# Altium PCB Simple_Foc_Core.pcbdoc
Units mil, origin at the board's own origin, x right, y up, seen from the top; angles counter-clockwise.
Board outline 2955 x 2795 mil, 2 copper layers (Top Layer, Bottom Layer); 21 components, 60 nets, 187 pads, 97 vias.
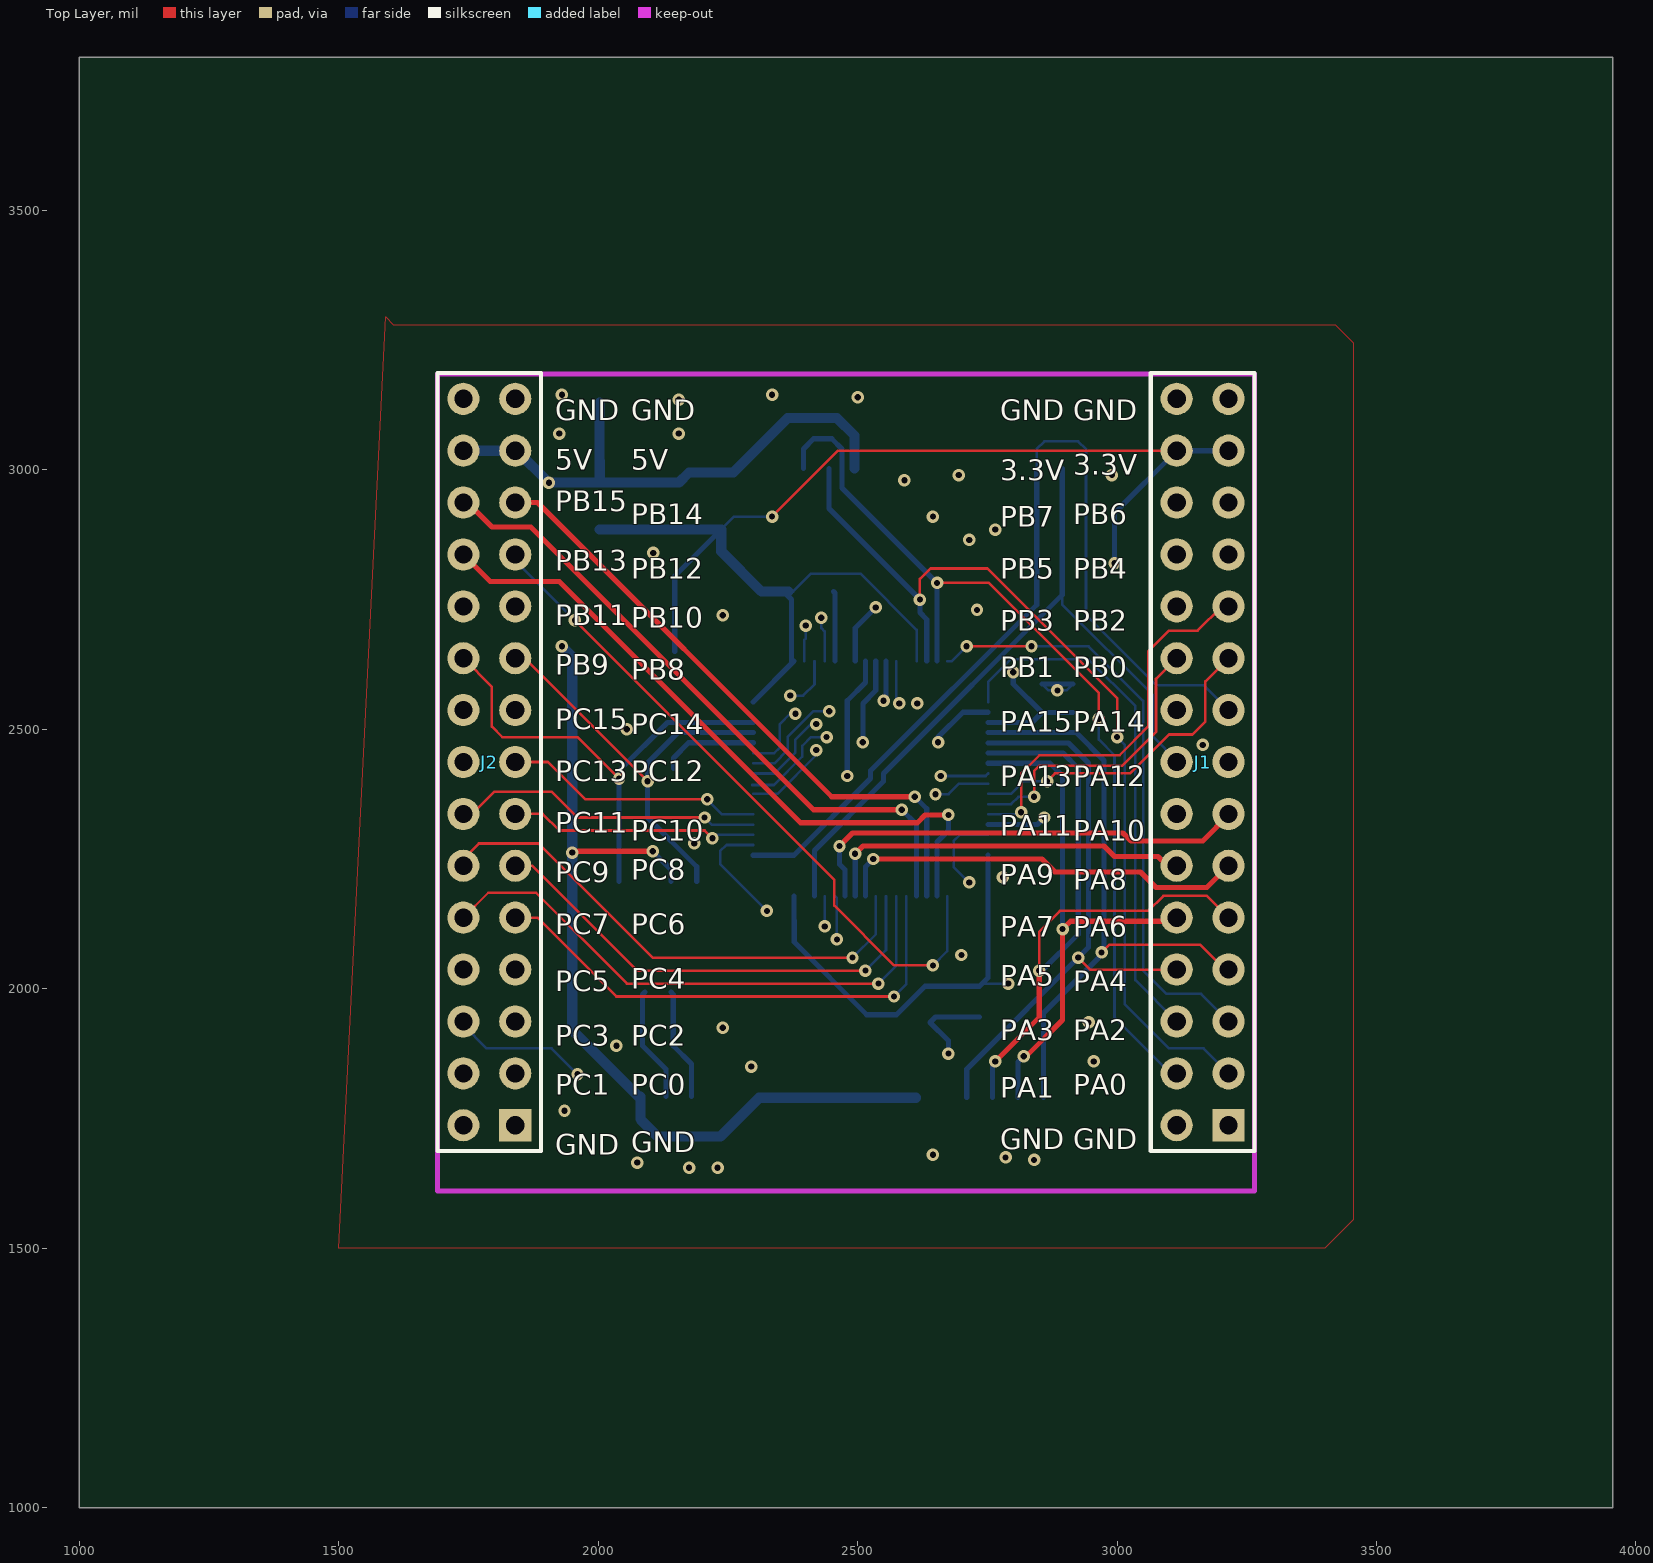
[diagram p0: Top Layer view]
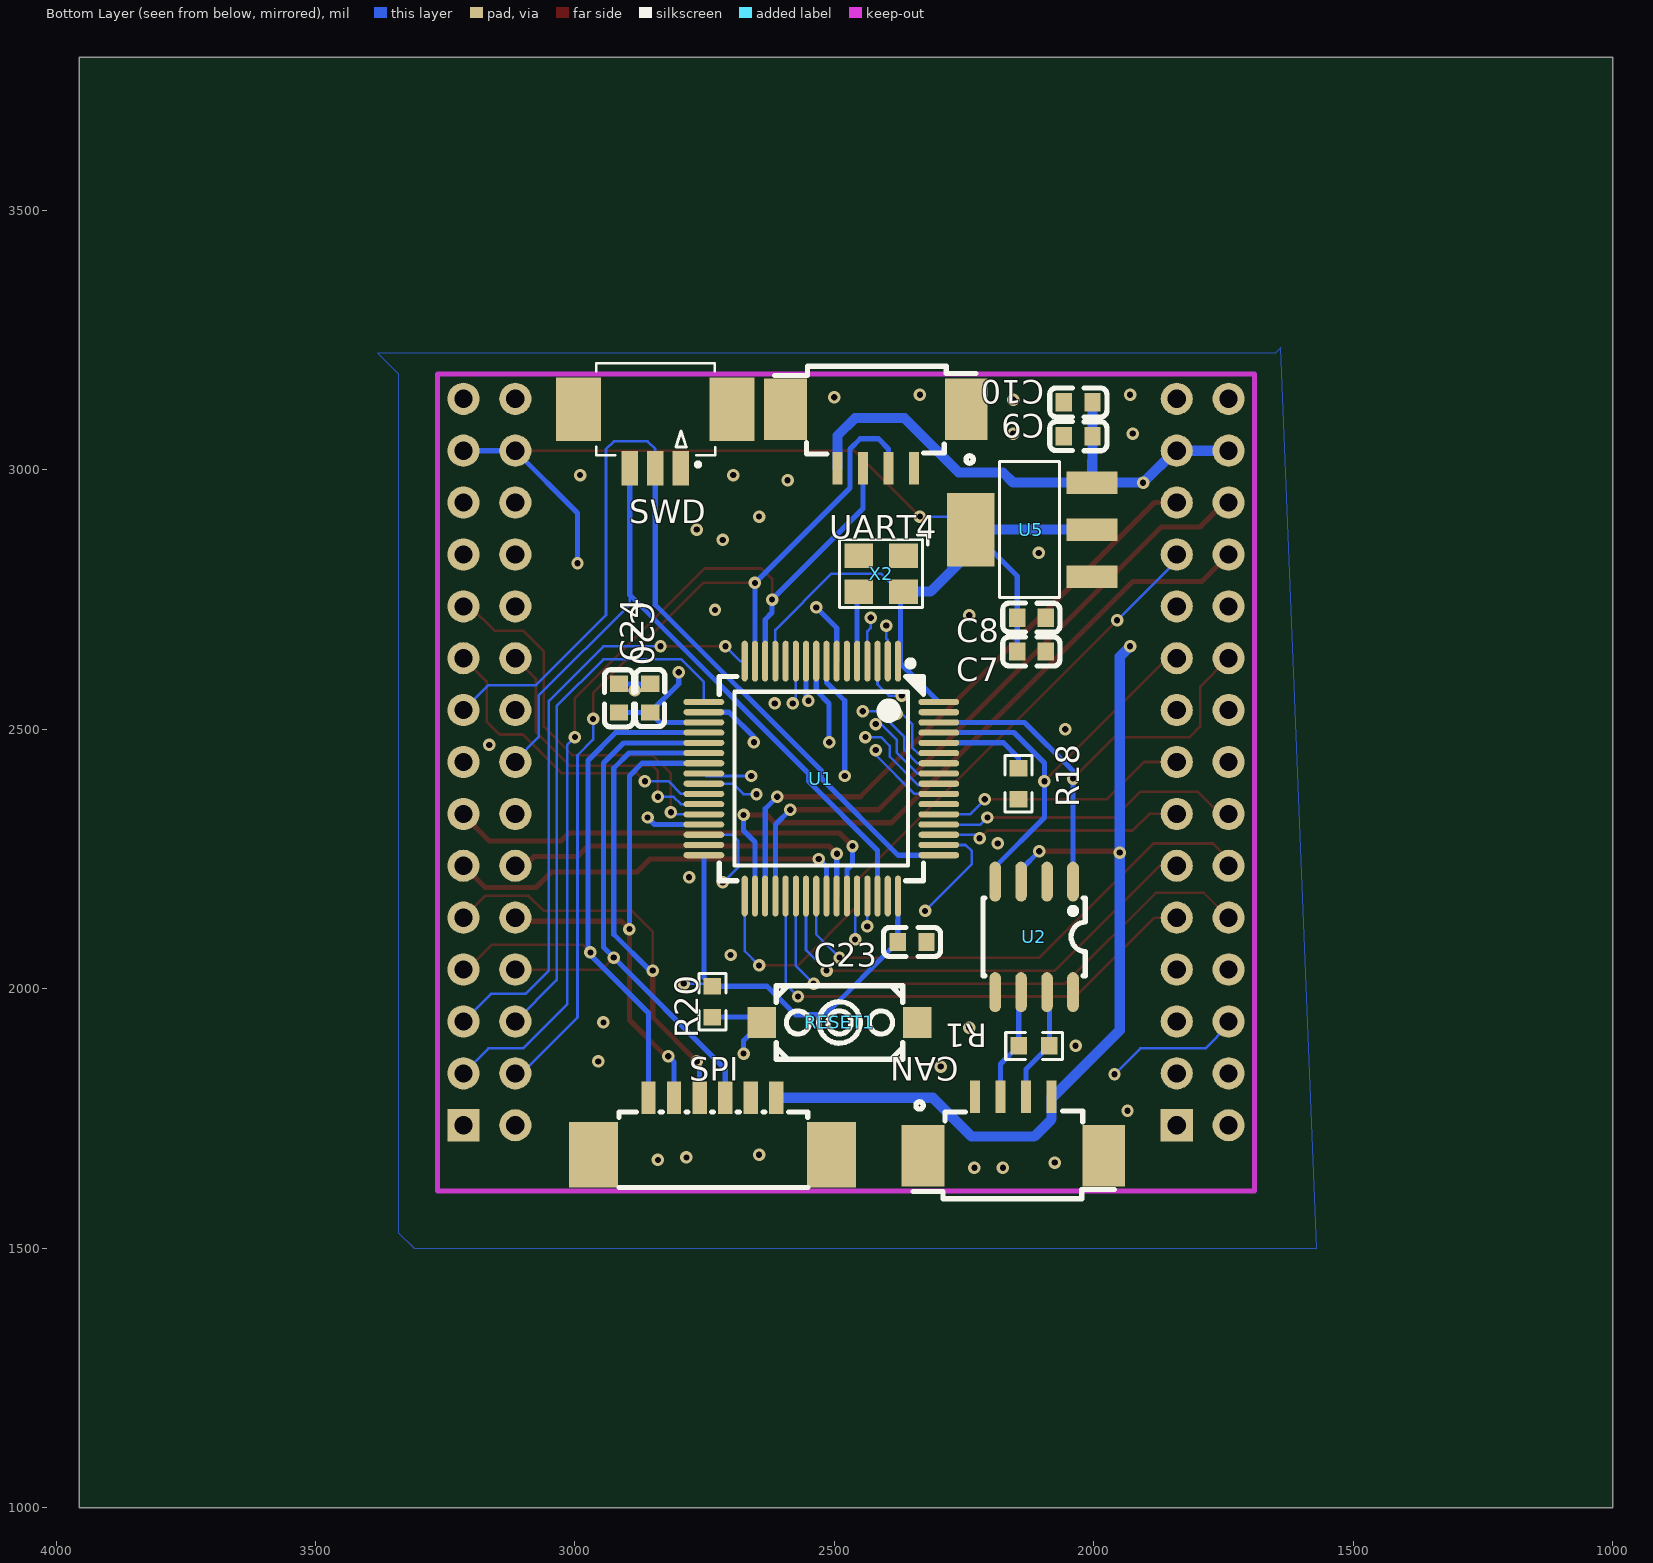
[diagram p1: Bottom Layer view, seen from below]

## Layer stack, top to bottom
Top Layer: signal copper (thickness not stored)
Dielectric: dielectric 12.6, FR-4, Dk 4.8
Bottom Layer: signal copper (thickness not stored)

## Board outline
3955,1000 1000,1000 1000,3795 3955,3795

## Components (designator, comment, footprint, x,y, rotation, side; value= is the part's Value field where it differs from the comment)
C7 "22u" C0603 2120,2650 r0 bottom
C8 "0.1u" C0603 2120,2715 r0 bottom
C9 "22u" C0603 2030,3065 r180 bottom
C10 "0.1u" C0603 2030,3130 r180 bottom
C20 "10uF" C0603 2855,2560 r90 bottom
C23 "0.1uF" C0603 2350,2090 r0 bottom
C24 "10nF" C0603 2915,2560 r270 bottom
CAN "1.25-4P WT" CONN-SMD_1.25-4PWT 2155,1735 r180 bottom
J1 "HDR-M-2.54_2x15" HDR-M-2.54_2X15 3164.8,2436.97 r90 top
J2 "HDR-M-2.54_2x15" HDR-M-2.54_2X15 1790,2436.97 r90 top
R1 "120R" R0603 2115,1890 r180 bottom
R18 "1k" R0603 2145,2395 r270 bottom
R20 "1k" R0603 2735,1975 r270 bottom
RESET1 "K2-3.6×6.1_SMD" KEY-SMD_2P-L6.2-W3.6-LS8.0 2490,1935 r0 bottom
SPI "1.25T-6P-WT" CONN-SMD_6P-P1.25_1.25T-6P-WT 2735,1735 r0 bottom
SWD "1.25T-3PWT" CONN-SMD_3P-P1.25_1.25T-3PWT 2845,3060 r0 bottom
U1 "STM32F405RGT6" LQFP-64_L10.0-W10.0-P0.50-LS12.0-BL 2525,2405 r180 bottom
U2 "TJA1050T/CM,118" SOIC-8_L5.0-W4.0-P1.27-LS6.0-BL 2115,2100 r180 bottom
U5 "AMS1117-3.3" SOT-223-3_L6.5-W3.4-P2.30-LS7.0-BR 2120,2885 r0 bottom
UART4 "1.25-4P WT" CONN-SMD_1.25-4PWT 2420,3060 r0 bottom
X2 "8MHz" OSC-SMD_4P-L3.2-W2.5-BL 2410,2800 r180 bottom

## Footprints (in the part's own frame and the unit in brackets; to place one, negate y for a bottom-side part, rotate by r counter-clockwise, add the part's x,y. Pads: shape width x height; smd on the part's side, far side on the other; paste and mask are expansions set on the pad)
C0603 [mm]
  rect 0.8x0.9 smd: 1(0.7,0) 2(-0.7,0)
  silkscreen extent -1.39,-0.72 1.41,0.71
CONN-SMD_1.25-4PWT [mm]
  rect 0.5x1.6 smd: 1(-1.875,1.45) 2(-0.625,1.45) 3(0.625,1.45) 4(1.875,1.45)
  rect 2.1x3 smd: 5(-4.425,-1.45) 6(4.425,-1.45)
  silkscreen extent -4.9,-3.55 4.95,1.2
CONN-SMD_3P-P1.25_1.25T-3PWT [mm]
  rect 0.8x1.7 smd: 1(-1.25,1.45) 2(0,1.45) 3(1.25,1.45)
  rect 2.2x3.1 smd: 4(3.75,-1.45) 5(-3.75,-1.45)
  silkscreen extent -2.94,-3.7 2.9,1.36
CONN-SMD_6P-P1.25_1.25T-6P-WT [mm]
  rect 0.7x1.6 smd: 1(-3.125,-1.398) 2(-1.875,-1.398) 3(-0.625,-1.399) 4(0.625,-1.401) 5(1.875,-1.401) 6(3.125,-1.402)
  rect 2.4x3.2 smd: 7(5.825,1.402) 8(-5.825,1.401)
  silkscreen extent -4.67,-0.7 4.58,3
HDR-M-2.54_2X15 [mil]
  rect 62x62 hole 35: 1(-700,-50)
  round 62 hole 35: 2(-700,50) 3(-600,-50) 4(-600,50) 5(-500,-50) 6(-500,50) 7(-400,-50) 8(-400,50) 9(-300,-50) 10(-300,50) 11(-200,-50) 12(-200,50) 13(-100,-50) 14(-100,50) 15(0,-50) 16(0,50) 17(100,-50) 18(100,50) 19(200,-50) 20(200,50) 21(300,-50) 22(300,50) 23(400,-50) 24(400,50) 25(500,-50) 26(500,50) 27(600,-50) 28(600,50) 29(700,-50) 30(700,50)
  silkscreen extent -750,-100 750,100
KEY-SMD_2P-L6.2-W3.6-LS8.0 [mm]
  rect 1.4x1.5 smd: 1(3.8,0) 2(-3.8,0)
  silkscreen extent -3.1,-1.8 3.1,1.8
LQFP-64_L10.0-W10.0-P0.50-LS12.0-BL [mm]
  oval 0.3x2 smd: 1(3.75,5.75) 2(3.25,5.75) 3(2.75,5.75) 4(2.25,5.75) 5(1.75,5.75) 6(1.25,5.75) 7(0.75,5.75) 8(0.25,5.75) 9(-0.25,5.75) 10(-0.75,5.75) 11(-1.25,5.75) 12(-1.75,5.75) 13(-2.25,5.75) 14(-2.75,5.75) 15(-3.25,5.75) 16(-3.75,5.75) 33(-3.75,-5.75) 34(-3.25,-5.75) 35(-2.75,-5.75) 36(-2.25,-5.75) 37(-1.75,-5.75) 38(-1.25,-5.75) 39(-0.75,-5.75) 40(-0.25,-5.75) 41(0.25,-5.75) 42(0.75,-5.75) 43(1.25,-5.75) 44(1.75,-5.75) 45(2.25,-5.75) 46(2.75,-5.75) 47(3.25,-5.75) 48(3.75,-5.75)
  oval 2x0.3 smd: 17(-5.75,3.75) 18(-5.75,3.25) 19(-5.75,2.75) 20(-5.75,2.25) 21(-5.75,1.75) 22(-5.75,1.25) 23(-5.75,0.75) 24(-5.75,0.25) 25(-5.75,-0.25) 26(-5.75,-0.75) 27(-5.75,-1.25) 28(-5.75,-1.75) 29(-5.75,-2.25) 30(-5.75,-2.75) 31(-5.75,-3.25) 32(-5.75,-3.75) 49(5.75,-3.75) 50(5.75,-3.25) 51(5.75,-2.75) 52(5.75,-2.25) 53(5.75,-1.75) 54(5.75,-1.25) 55(5.75,-0.75) 56(5.75,-0.25) 57(5.75,0.25) 58(5.75,0.75) 59(5.75,1.25) 60(5.75,1.75) 61(5.75,2.25) 62(5.75,2.75) 63(5.75,3.25) 64(5.75,3.75)
  silkscreen extent -5,-5 5,5.79
OSC-SMD_4P-L3.2-W2.5-BL [mm]
  rect 1.4x1.2 smd: 1(1.1,0.875) 2(-1.1,0.875) 3(-1.1,-0.875) 4(1.1,-0.875)
  silkscreen extent -2.03,-1.65 2.29,1.9
R0603 [mil]
  rect 31.75x34.02 smd: 1(29.66,0) 2(-29.66,0)
  silkscreen extent -55,-26 55,26
SOIC-8_L5.0-W4.0-P1.27-LS6.0-BL [mil]
  oval 22.38x76.78 smd: 1(75,106.5) 2(25,106.5) 3(-25,106.5) 4(-75,106.5) 5(-75,-106.5) 6(-25,-106.5) 7(25,-106.5) 8(75,-106.5)
  silkscreen extent -98,-75 98,75
SOT-223-3_L6.5-W3.4-P2.30-LS7.0-BR [mm]
  rect 2.5x1.1 smd: 1(-2.97,2.3) 2(-2.97,0) 3(-2.97,-2.3)
  rect 2.34x3.6 smd: 4(2.97,0)
  silkscreen extent -1.37,-3.33 1.57,3.33

## Via types
v1: diameter 24, hole 12, Top Layer to Bottom Layer, tented both sides, 97 vias

## Nets (pads, with @x,y where several pads share a name; then routed paths per layer and width w, separated by ;. In a path a pad name is that pad's centre, name@x,y a point inside that pad or via, vN(x,y) a via of type N, cw(c..) or ccw(c..) an arc to the next point about the centre after c; other vN are vias at no path point)
+3.3V: C7.1 C8.1 C20.2 C23.1 C24.1 J1.27 J1.28 R20.2 U1.1 U1.13 U1.19 U1.32 U1.48 U1.64 U5.2 U5.4 X2.4 | length 5406.1
  Top Layer w5: v1(2335,2910) 2461.97,3036.97 J1.28
  Mid-Layer 1 w5: v1(2995,2820) 3030,2785 3160,2785 3165,2780 v1(3165,2470)
  Mid-Layer 1 w10: v1(2800,2610) 2820,2630 2855,2630 2965,2740 2965,2790 v1(2995,2820)
  Mid-Layer 2 w5: v1(2790,2010) 2815,1985 3130,1985 3165,2020 v1(3165,2470)
  Bottom Layer w5: U5.4 2261.93,2910 v1(2335,2910) ; X2.4@2366.69,2765.55 2375.55,2765.55 2410,2800 2505,2800 2613.6,2691.4 U1.13 ; R20.2 2740.34,2010 v1(2790,2010)
  Bottom Layer w10: C7.1 C8.1 2147.56,2795.63 U5.4 ; U1.64 U1.1 ; X2.4@2361.69,2760.55 2372.36,2749.88 U1.1@2372.36,2626.37 ; U1.48 C23.1 2517.6,1950 2575,1950 2629.7,2004.7 R20.2 ; R20.2 2751.37,2021.03 U1.32 ; U1.19 2835.83,2513.27 C20.2 ; v1(2800,2610) 2800,2587.44 C20.2 ; C24.1 C20.2 ; v1(2995,2820) 2995,2917.17 J1.28 J1.27
  Bottom Layer w19.68: U5.2 U5.4 2236.93,2843.07 2314.45,2765.55 X2.4@2366.69,2765.55
+5V: C9.1 C10.1 CAN.4 J2.27 J2.28 SPI.1 U2.3 U5.3 UART4.4 | length 3169
  Top Layer w10: v1(1950,2262.5) 1952.5,2265 v1(2105,2265)
  Mid-Layer 2 w19.68: v1(1905,2975) 1905,2685 v1(1930,2660)
  Bottom Layer w10: v1(2105,2265) 2140,2230 U2.3
  Bottom Layer w19.68: J2.28 J2.27 1843.03,3036.97 v1(1905,2975) 1905.55,2975.55 U5.3@2003.07,2975.55 ; v1(1930,2660) 1950,2640 v1(1950,2262.5) 1950,1920 2000,1870 2077.92,1792.08 CAN.4 2081.2,1748.8 2115,1715 2235,1715 2310,1790 SPI.1 ; C9.1 2003.1,2975.5 2155.5,2975.5 2175,2995 2260,2995 2365,3100 2460,3100 2493.8,3066.2 UART4.4 ; C9.1 C10.1
CAN1_RX: J2.19 U1.61 U2.4 | length 848.9
  Top Layer w5: J2.19 1858.03,2636.97 v1(2095,2400)
  Bottom Layer w10: U2.4 2190,2235 2095,2330 2095,2435 2153.6,2493.6 U1.61
CAN1_TX: J2.20 U1.62 U2.1 | length 951.9
  Top Layer w5: J2.20 1795,2581.97 1795,2525 1795,2505 1815,2485 1960,2485 v1(2040,2405)
  Bottom Layer w10: U2.1 2040,2420 2133.3,2513.3 U1.62
CAN_H: CAN.3 R1.1 U2.7 | length 222
  Bottom Layer w10: U2.7 2085.34,1988.84 R1.1 2130.4,1844.94 CAN.3
CAN_L: CAN.2 R1.2 U2.6 | length 217.8
  Bottom Layer w10: U2.6 2144.66,1988.84 R1.2 2179.61,1855.05 CAN.2
GND: C7.2 C8.2 C9.2 C10.2 C20.1 C23.2 C24.2 CAN.1 J1.1 J1.2 J1.29 J1.30 J2.1 J2.2 J2.29 J2.30 R18.1 RESET1.2 SPI.2 SWD.1 U1.12 U1.18 U1.63 U2.2 U2.8 U5.1 UART4.1 X2.2 | length 256.6
  Bottom Layer w5: C20.1 2867.56,2575 v1(2885,2575) 2902.44,2575 C24.2
  Bottom Layer w10: v1(2655,2475) 2655,2485 2702.95,2532.95 U1.18 ; C20.1 C24.2
  other v1: 2175,1655 2230,1655 2075,1665 2840,1670 2785,1675 2645,1680 1935,1765 2295,1850 2955,1860 2035,1890 2240,1925 2945,1935 2700,2065 2185,2280 2055,2500 2615,2550 2240,2720 2730,2730 2715,2865 2765,2885 2645,2910 2590,2980 2695,2990 2990,2990 1925,3070 2155,3070 2155,3135 2500,3140 1930,3145 2335,3145
IIC1_SCL: J1.25 U1.58 | length 1178
  Mid-Layer 2 w5: v1(2445,2535) 2454.46,2535 2464.46,2525 ; 2465,2525 2775.72,2525 ; 2775,2525 3060,2810 3060,2845 3100,2885 3180,2885 3214.8,2919.8 J1.25
  Bottom Layer w5: U1.58 2339.5,2434.5 2365,2460 2365,2485 2415,2535 v1(2445,2535)
IIC1_SDA: J1.26 U1.59 | length 1070.2
  Mid-Layer 2 w5: v1(2380,2530) 2410,2560 2515,2560 2535,2580 2805,2580 3040,2815 3040,2862.17 J1.26
  Bottom Layer w5: U1.59 2339.2,2454.2 2350,2465 2350,2510 2370,2530 v1(2380,2530)
INC_A: J2.9 U1.37 | length 996.5
  Top Layer w5: J2.9 1883,2137 2035,1985 v1(2570,1985)
  Bottom Layer w5: v1(2570,1985) 2593.9,2008.9 U1.37
INC_B: J2.10 U1.38 | length 1075.2
  Top Layer w5: J2.10 1788.03,2185 1880,2185 2055,2010 v1(2540,2010)
  Bottom Layer w5: v1(2540,2010) 2574.21,2044.21 U1.38
INC_Z: J2.11 U1.39 | length 918.7
  Top Layer w5: J2.11 1873.03,2236.97 2075,2035 v1(2515,2035)
  Bottom Layer w5: v1(2515,2035) 2554.53,2074.53 U1.39
IU: J2.3 U1.8 | length 1113.3
  Mid-Layer 1 w10: J2.3 1907,1837 v1(2480,2410)
  Bottom Layer w10: v1(2480,2410) 2480,2555 2515.16,2590.16 U1.8
IV: J2.4 U1.9 | length 1200.9
  Mid-Layer 1 w10: J2.4 1757,1837 1810,1890 1920,1890 2505,2475 v1(2510,2475)
  Bottom Layer w10: v1(2510,2475) 2510,2550 2534.84,2574.84 U1.9
IW: J2.5 U1.10 | length 1044.2
  Mid-Layer 1 w10: J2.5 1931.97,1936.97 v1(2550,2555)
  Bottom Layer w10: v1(2550,2555) 2554.53,2559.53 U1.10
PA2: J1.5 U1.16 | length 1158.1
  Top Layer w5: v1(2710,2660) v1(2835,2660)
  Bottom Layer w5: U1.16 2681.37,2631.37 v1(2710,2660) ; v1(2835,2660) 2945,2660 3050,2555 3050,2035 3095,1990 3161.8,1990 J1.5
PA3: J1.6 U1.17 | length 1018.8
  Bottom Layer w5: U1.17 2751.4,2591.4 2795,2635 2945,2635 3035,2545 3035,2016.8 J1.6
PA11: J1.14 U1.44 | length 840.3
  Mid-Layer 1 w5: v1(2460,2095) 2790,2095 3032,2337 J1.14
  Bottom Layer w5: U1.44 2460,2174.73 v1(2460,2095)
PA12: J1.15 U1.45 | length 968.3
  Mid-Layer 1 w5: v1(2436.42,2120) 2785,2120 3055,2390 3167.8,2390 J1.15
  Bottom Layer w5: v1(2436.42,2120) U1.45
PA15: J1.18 U1.50 | length 1189.9
  Mid-Layer 1 w5: v1(2325,2150) 2760,2150 3114.8,2504.8 J1.18
  Bottom Layer w5: U1.50@2298.6,2277.1 2247.1,2277.1 2235,2265 2235,2240 v1(2325,2150)
PB0: J1.19 U1.26 | length 616.9
  Top Layer w5: v1(2865,2400) 2880,2415 3025,2415 3100,2490 3145,2490 3170,2515 3170,2592.2 J1.19
  Bottom Layer w5: U1.26 2795.5,2375.5 2820,2400 v1(2865,2400)
PB1: J1.20 U1.27 | length 569
  Top Layer w5: v1(2840,2370) 2840,2390 2840,2420 2850,2430 3010,2430 3075,2495 3075,2597.17 J1.20
  Bottom Layer w5: U1.27 2795.79,2355.79 2810,2370 v1(2840,2370)
PB2: J1.21 U1.28 | length 758.4
  Top Layer w5: v1(2815,2340) 2815,2415 2850,2450 3005,2450 3060,2505 3060,2650 3100,2690 3155,2690 3202,2737 J1.21
  Bottom Layer w5: U1.28 2811.1,2336.1 v1(2815,2340)
PB3: J1.22 U1.55 | length 1062.4
  Mid-Layer 2 w5: v1(2420,2460) 2445,2435 2915,2435 3062.8,2582.8 3062.8,2685 J1.22
  Bottom Layer w5: U1.55 2345.5,2375.5 2420,2450 v1(2420,2460) v1@2410,2460
PB4: J1.23 U1.56 | length 1216.5
  Mid-Layer 2 w5: v1(2440,2485) 2445,2485 2480,2450 2840,2450 2980,2590 3020,2590 3020,2715 3090,2785 3162.8,2785 J1.23
  Bottom Layer w5: U1.56@2296.81,2392.58 2338.35,2392.58 2393.19,2447.42 2393.19,2468.19 2410,2485 v1(2440,2485)
PB5: J1.24 U1.57 | length 1012.5
  Mid-Layer 2 w5: v1(2420,2510) 2760,2510 2770,2500 3112,2837 J1.24
  Bottom Layer w5: U1.57 2339.84,2414.84 2380,2455 2380,2480 2410,2510 v1(2420,2510)
PB10: J2.21 U1.29 | length 1487.5
  Mid-Layer 1 w5: J2.21 1943,2840 v1(2106.18,2840) 2470,2840 2895,2415 2895,2365 v1(2860,2330)
  Bottom Layer w10: U1.29 2846.42,2316.42 v1(2860,2330)
PB11: J2.22 U1.30 | length 1631.7
  Mid-Layer 1 w5: J2.22 1748,2737 1795,2690 1870,2690 1980,2800 2430,2800 2715,2515 v1(2715,2205)
  Bottom Layer w5: v1(2715,2205) 2685,2235 2685,2255 2685,2285 2696.73,2296.73 2700,2296.73 U1.30
PB12: J2.23 U1.33 | length 1314.4
  Top Layer w5: v1(1955,2710) 2455,2210 2455,2160 2570,2045 v1(2645,2045)
  Bottom Layer w5: J2.23 1840,2825 v1(1955,2710) ; v1(2645,2045) 2672.64,2072.64 U1.33
PC3: J2.6 U1.11 | length 1333.6
  Mid-Layer 1 w5: v1(1960,1835) 1990,1865 1990,1890 2475,2375 2495,2375 2580,2460 v1(2580,2550)
  Bottom Layer w5: J2.6 1740,1930 1785,1885 1910,1885 v1(1960,1835) ; U1.11 2574.21,2555.79 v1(2580,2550)
PC4: J2.7 U1.24 | length 1067.9
  Mid-Layer 2 w5: J2.7 1916.97,2036.97 1980,2100 2210,2100 2520,2410 v1(2660,2410)
  Bottom Layer w5: v1(2660,2410) 2746.53,2410 U1.24
PC5: J2.8 U1.25 | length 1219.4
  Mid-Layer 2 w5: J2.8 1791.97,1985 1910,1985 2000,2075 2215,2075 2535,2395 2630,2395 v1(2650,2375)
  Bottom Layer w5: v1(2650,2375) 2675,2375 2695.16,2395.16 U1.25
PC9: J2.12 U1.40 | length 1003.8
  Top Layer w5: J2.12 1740,2250 1770,2280 1885,2280 2105,2060 v1(2490,2060)
  Bottom Layer w5: v1(2490,2060) 2534.84,2104.84 U1.40
PC10: J2.13 U1.51 | length 480.9
  Top Layer w5: J2.13 1893,2337 1925,2305 2205,2305 v1(2220,2290)
  Bottom Layer w5: v1(2220,2290) 2226.73,2296.73 U1.51
PC11: J2.14 U1.52 | length 602.8
  Top Layer w5: J2.14 1756.97,2336.97 1800,2380 1910,2380 1960,2330 v1(2205,2330)
  Bottom Layer w5: v1(2205,2330) 2218.58,2316.42 U1.52
PC12: J2.15 U1.53 | length 500.4
  Top Layer w5: J2.15 1903.03,2436.97 1975,2365 v1(2210,2365)
  Bottom Layer w5: v1(2210,2365) 2238.9,2336.1 U1.53
PC13: J2.16 U1.2 | length 878.7
  Mid-Layer 1 w5: J2.16 1740,2450 1790,2500 1790,2555 1815,2580 2260,2580 2380,2700 v1(2400,2700)
  Bottom Layer w5: U1.2@2397.05,2631.37 2397.05,2672.05 2400,2675 v1(2400,2700)
PC14: J2.17 U1.3 | length 642
  Mid-Layer 1 w5: J2.17 2341.97,2536.97 v1(2370,2565)
  Bottom Layer w5: v1(2370,2565) 2395,2565 2416.7,2586.7 U1.3
PC15: J2.18 U1.4 | length 862.4
  Mid-Layer 1 w5: J2.18 1798,2595 2225,2595 2360,2730 2415,2730 v1(2430,2715)
  Bottom Layer w5: v1(2430,2715) 2430,2695 2436.4,2688.6 U1.4
PWM1: J1.11 U1.41 | length 802.5
  Top Layer w10: v1(2530,2250) 2855,2250 2880,2225 3045,2225 3075,2195 3172.8,2195 J1.11
  Bottom Layer w10: U1.41 2515.16,2235.16 v1(2530,2250)
PWM1N: J2.24 U1.34 | length 1320.9
  Top Layer w10: J2.24 1792,2785 1925,2785 2390,2320 2615,2320 2630,2335 v1(2675,2335)
  Bottom Layer w10: U1.34 2652.95,2282.95 2675,2305 v1(2675,2335)
PWM2: J1.12 U1.42 | length 723.3
  Top Layer w10: v1(2495,2260) 2510,2275 2975,2275 2995,2255 3078.76,2255 3096.79,2236.97 J1.12
  Bottom Layer w10: v1(2495,2260) 2495.47,2259.53 U1.42
PWM2N: J2.25 U1.35 | length 1205.9
  Top Layer w10: J2.25 1883,2937 2450,2370 v1(2610,2370)
  Bottom Layer w10: v1(2610,2370) 2633.27,2346.73 U1.35
PWM3: J1.13 U1.43 | length 890
  Top Layer w10: v1(2465,2275) 2490,2300 3011.62,2300 3026.62,2285 3165,2285 3214.8,2334.8 J1.13
  Bottom Layer w10: v1(2465,2275) 2465,2240 2475.79,2229.21 U1.43
PWM3N: J2.26 U1.36 | length 1268.4
  Top Layer w10: J2.26 1748,2937 1795,2890 1870,2890 2415,2345 v1(2585,2345)
  Bottom Layer w10: v1(2585,2345) 2613.58,2316.42 U1.36
R18_2: R18.2 U1.60 | length 186.3
  Bottom Layer w10: R18.2 2145,2445 2174,2474 U1.60@2299,2474
RESET: R20.1 RESET1.1 U1.7 | length 1308.1
  Mid-Layer 1 w5: v1(2535,2735) 2780,2490 v1(2780,2215)
  Mid-Layer 2 w5: v1(2675,1875) 2690,1875 2740,1925 2740,2175 v1(2780,2215)
  Bottom Layer w10: U1.7 2495.47,2695.47 v1(2535,2735) ; v1(2675,1875) 2675,1899.6 RESET1.1 2649.94,1945.34 R20.1
S$1126: 
SPI1_CS: J1.7 SPI.6 U1.20 | length 1217.9
  Top Layer w5: v1(2970,2070) 2985,2085 3160,2085 3208,2037 J1.7
  Bottom Layer w10: U1.20 2921.4,2493.6 2975,2440 2975,2070 v1(2970,2070) 2970,2065 2858,1953 SPI.6
SPI1_MISO: J1.9 SPI.4 U1.22 | length 1426.4
  Top Layer w5: v1(2850,2035) 2850,2110 2890,2150 3060,2150 3089,2179 3172.8,2179 J1.9
  Top Layer w10: v1(2765,1860) 2850,1945 v1(2850,2035)
  Bottom Layer w10: U1.22 2800,2454.21 ; U1.22 2895.8,2454.2 2925,2425 2925,2105 2855,2035 v1(2850,2035) ; SPI.4 2759.61,1854.61 v1(2765,1860)
SPI1_MOSI: J1.10 SPI.5 U1.23 | length 1041.1
  Top Layer w10: v1(2820,1870) 2825,1870 2895,1940 v1(2895,2115) 2910,2130 3107.83,2130 J1.10
  Bottom Layer w10: U1.23 2870.5,2434.5 2895,2410 v1(2895,2115) ; SPI.5 2808.82,1858.82 v1(2820,1870)
SPI1_SCK: J1.8 SPI.3 U1.21 | length 1151.1
  Top Layer w5: v1(2925,2060) 2948.03,2036.97 J1.8
  Bottom Layer w10: SPI.3 2710.4,1845.4 2945,2080 2945,2435 2906.1,2473.9 U1.21
SPI_7: SPI.7
SPI_8: SPI.8
SWC: J1.17 SWD.2 U1.49 | length 1833.1
  Bottom Layer w5: SWD.2 2845,3040 2860,3055 2925,3055 2940,3040 2940,2720 3075,2585 3166.8,2585 J1.17
  Bottom Layer w10: U1.49 2377.4,2257.4 2525,2405 2525,2420 2845,2740 SWD.2
SWD: J1.16 SWD.3 U1.46 | length 1679.4
  Bottom Layer w5: SWD.3 2894.2,2740.8 3070,2565 3070,2485 3114.8,2440.2 J1.16
  Bottom Layer w10: U1.46 2416.7,2266.7 2550,2400 2550,2415 2894.2,2759.2 SWD.3
U2_5: U2.5
UART4_RX: J1.4 U1.15 UART4.2 | length 1979.4
  Top Layer w5: v1@2652.9,2782.1 2752.9,2782.1 2965,2570 v1(2965,2520)
  Bottom Layer w5: v1(2965,2520) 2965,2480 2995,2450 2995,1945 ; J1.4 3103.03,1836.97 2995,1945 ; J1.4 3103,1837 2995,1945
  Bottom Layer w10: UART4.2 2395.4,3040.4 2415,3060 2450,3060 2470,3040 2470,2965 v1(2652.95,2782.05) U1.15
UART4_TX: J1.3 U1.14 UART4.3 | length 1832.4
  Top Layer w5: v1(2620,2750) 2620,2789.7 2640.3,2810 2750,2810 3000,2560 v1(3000,2485)
  Bottom Layer w5: v1(3000,2485) 3015,2470 3015,1970 3100,1885 3115,1885 3166.77,1885 J1.3
  Bottom Layer w10: UART4.3 2444.6,2925.4 v1(2620,2750) 2620,2725 2633.3,2711.7 U1.14
X2_3: U1.5 X2.3 | length 135.3
  Bottom Layer w10: X2.3 2456.1,2762.76 U1.5
pads on no net: CAN.5 CAN.6 SWD.4 SWD.5 U1.6 U1.31 U1.47 U1.54 UART4.5 UART4.6 X2.1

## Polygon pours and split planes (outlines as drawn)
GND on Bottom Layer (solid): 1640,3235 1650,3225 3380,3225 3340,3185 3340,1530 3310,1500 1570,1500
GND on Top Layer (solid): 1590,3295 1605,3280 3420,3280 3455,3245 3455,1555 3400,1500 1500,1500

## Silkscreen, mask and mechanical layers (free items; w line width, h text height)
Top Overlay:
  text "GND" at 1917.5,3095.32 h39.37
  text "GND" at 2063.75,3095.32 h39.37
  text "GND" at 2774.65,3095.32 h39.37
  text "GND" at 2915.7,3095.32 h39.37
  text "5V" at 1917.5,3000.32 h39.37
  text "5V" at 2063.75,3000.32 h39.37
  text "3.3V" at 2915.7,2990.32 h39.37
  text "3.3V" at 2774.66,2980.32 h39.37
  text "PB15" at 1917.5,2920.32 h39.37
  text "PB14" at 2063.75,2895.32 h39.37
  text "PB6" at 2915.7,2895.32 h39.37
  text "PB7" at 2774.65,2890.32 h39.37
  text "PB13" at 1917.5,2805.32 h39.37
  text "PB12" at 2063.75,2790.32 h39.37
  text "PB5" at 2774.65,2790.32 h39.37
  text "PB4" at 2915.7,2790.32 h39.37
  text "PB11" at 1917.5,2700.32 h39.37
  text "PB10" at 2063.75,2695.32 h39.37
  text "PB3" at 2774.65,2690.32 h39.37
  text "PB2" at 2915.7,2690.32 h39.37
  text "PB9" at 1917.5,2605.32 h39.37
  text "PB1" at 2774.65,2600.32 h39.37
  text "PB0" at 2915.7,2600.32 h39.37
  text "PB8" at 2063.75,2595.32 h39.37
  text "PC15" at 1917.5,2500.32 h39.37
  text "PA15" at 2774.65,2495.32 h39.37
  text "PA14" at 2915.7,2495.32 h39.37
  text "PC14" at 2063.75,2490.32 h39.37
  text "PC13" at 1917.5,2400.32 h39.37
  text "PC12" at 2063.75,2400.32 h39.37
  text "PA13" at 2774.65,2390.32 h39.37
  text "PA12" at 2915.7,2390.32 h39.37
  text "PC11" at 1917.5,2300.32 h39.37
  text "PA11" at 2774.65,2295.32 h39.37
  text "PC10" at 2063.75,2285.32 h39.37
  text "PA10" at 2915.7,2285.32 h39.37
  text "PC8" at 2063.75,2210.32 h39.37
  text "PC9" at 1917.5,2205.32 h39.37
  text "PA9" at 2774.65,2200.32 h39.37
  text "PA8" at 2915.7,2190.32 h39.37
  text "PC7" at 1917.5,2105.32 h39.37
  text "PC6" at 2063.75,2105.32 h39.37
  text "PA7" at 2774.65,2100.32 h39.37
  text "PA6" at 2915.7,2100.32 h39.37
  text "PA5" at 2774.65,2005.32 h39.37
  text "PC4" at 2063.75,2000.32 h39.37
  text "PC5" at 1917.5,1995.32 h39.37
  text "PA4" at 2915.71,1995.32 h39.37
  text "PA3" at 2774.65,1900.32 h39.37
  text "PA2" at 2915.7,1900.32 h39.37
  text "PC3" at 1917.5,1890.32 h39.37
  text "PC2" at 2063.75,1890.32 h39.37
  text "PC1" at 1917.5,1795.32 h39.37
  text "PC0" at 2063.75,1795.32 h39.37
  text "PA0" at 2915.7,1795.32 h39.37
  text "PA1" at 2774.65,1790.32 h39.37
  text "GND" at 2774.65,1690.32 h39.37
  text "GND" at 2915.7,1690.32 h39.37
  text "GND" at 2063.75,1685.32 h39.37
  text "GND" at 1917.5,1680.32 h39.37